# Altium PCB Micromouse_PCB.PcbDoc
Units mm, origin at the board's own origin, x right, y up, seen from the top; angles counter-clockwise.
Board outline 100 x 109.99 mm, 2 copper layers (Top Layer, Bottom Layer); 98 components, 75 nets, 345 pads, 0 vias.
Unrouted connection lines stored in the file: 242.
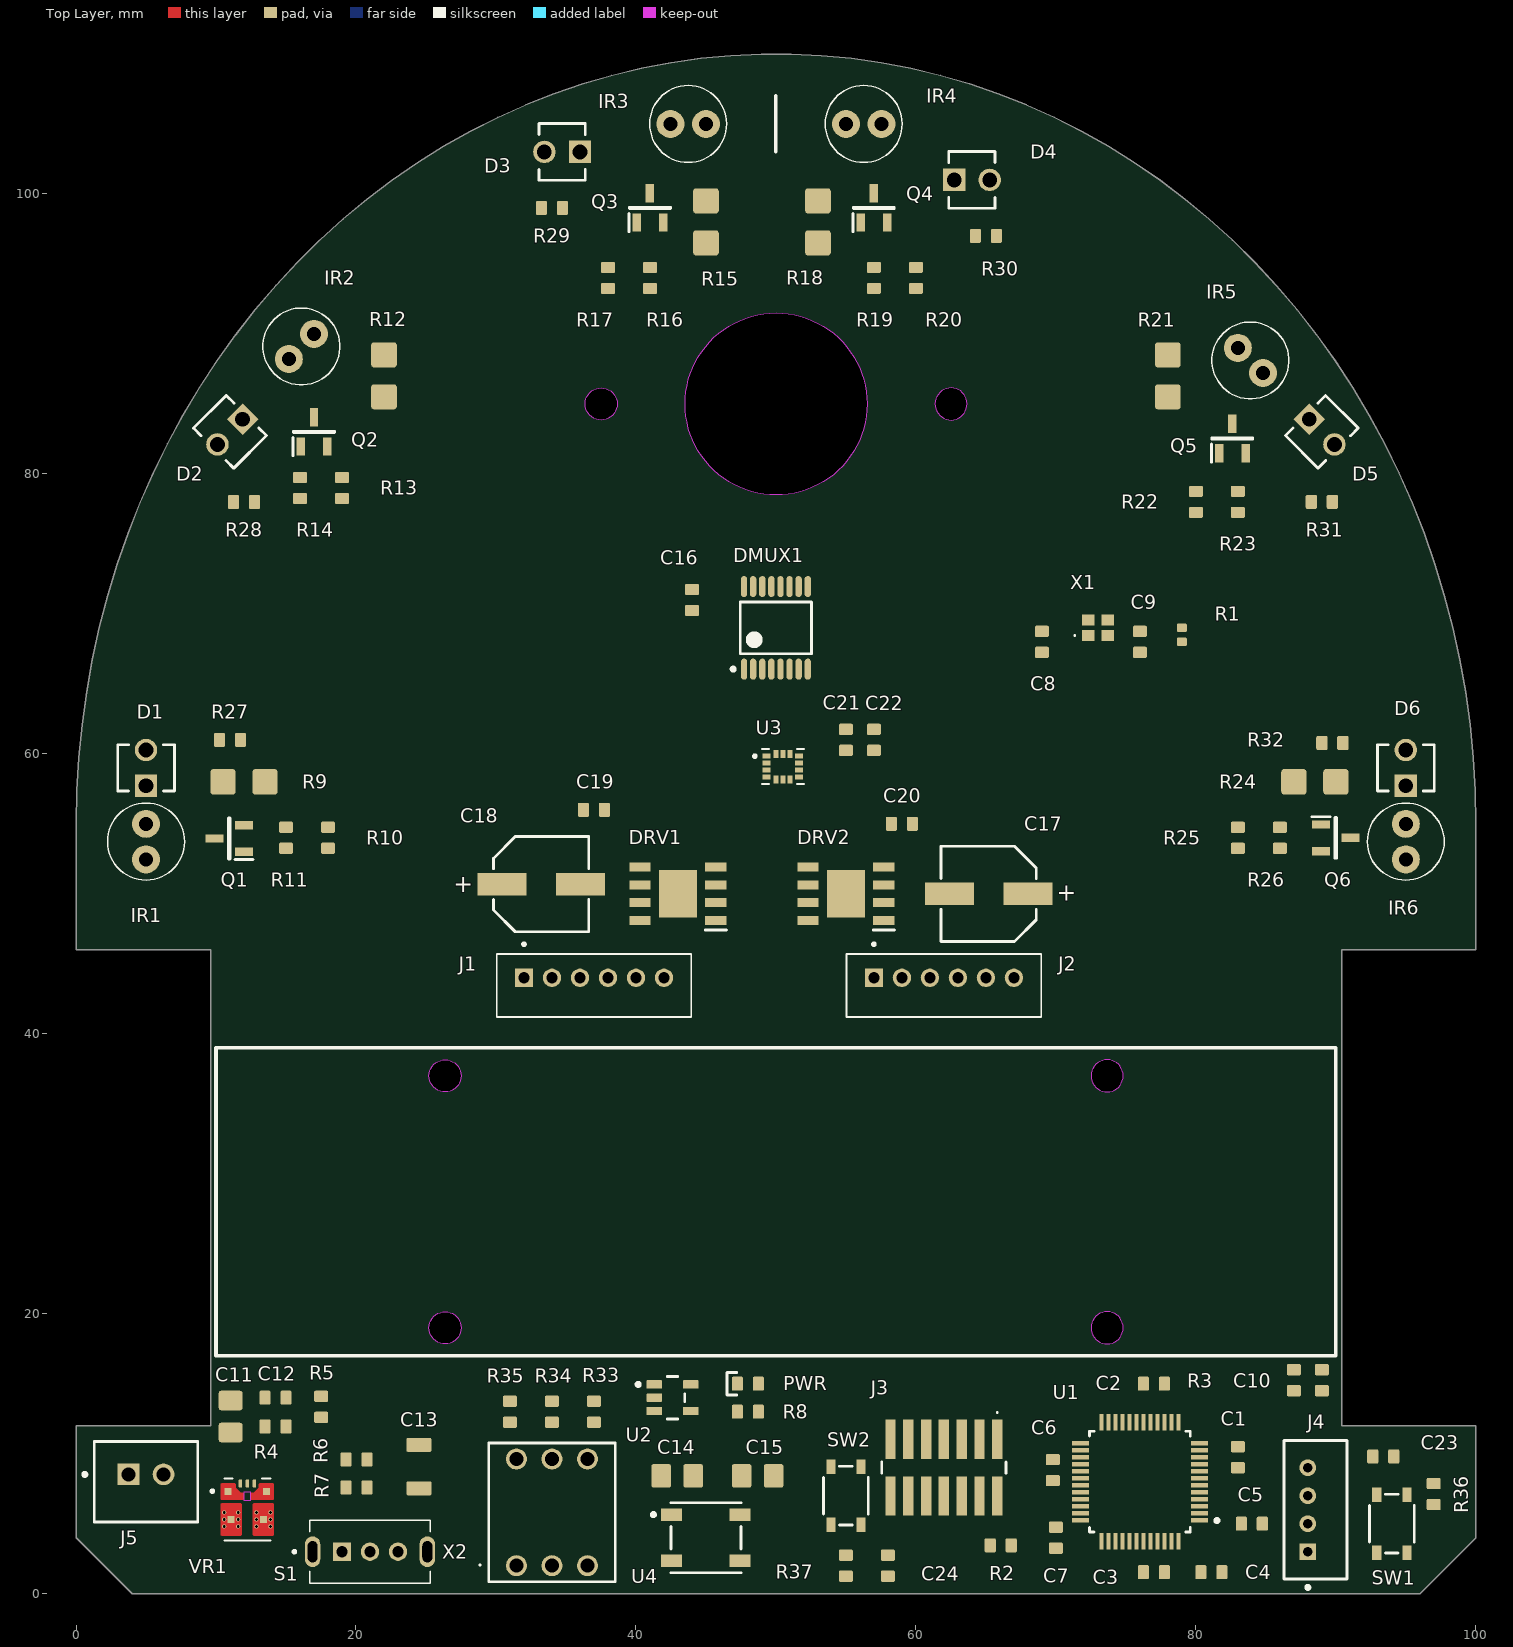
[diagram p0: Top Layer view]
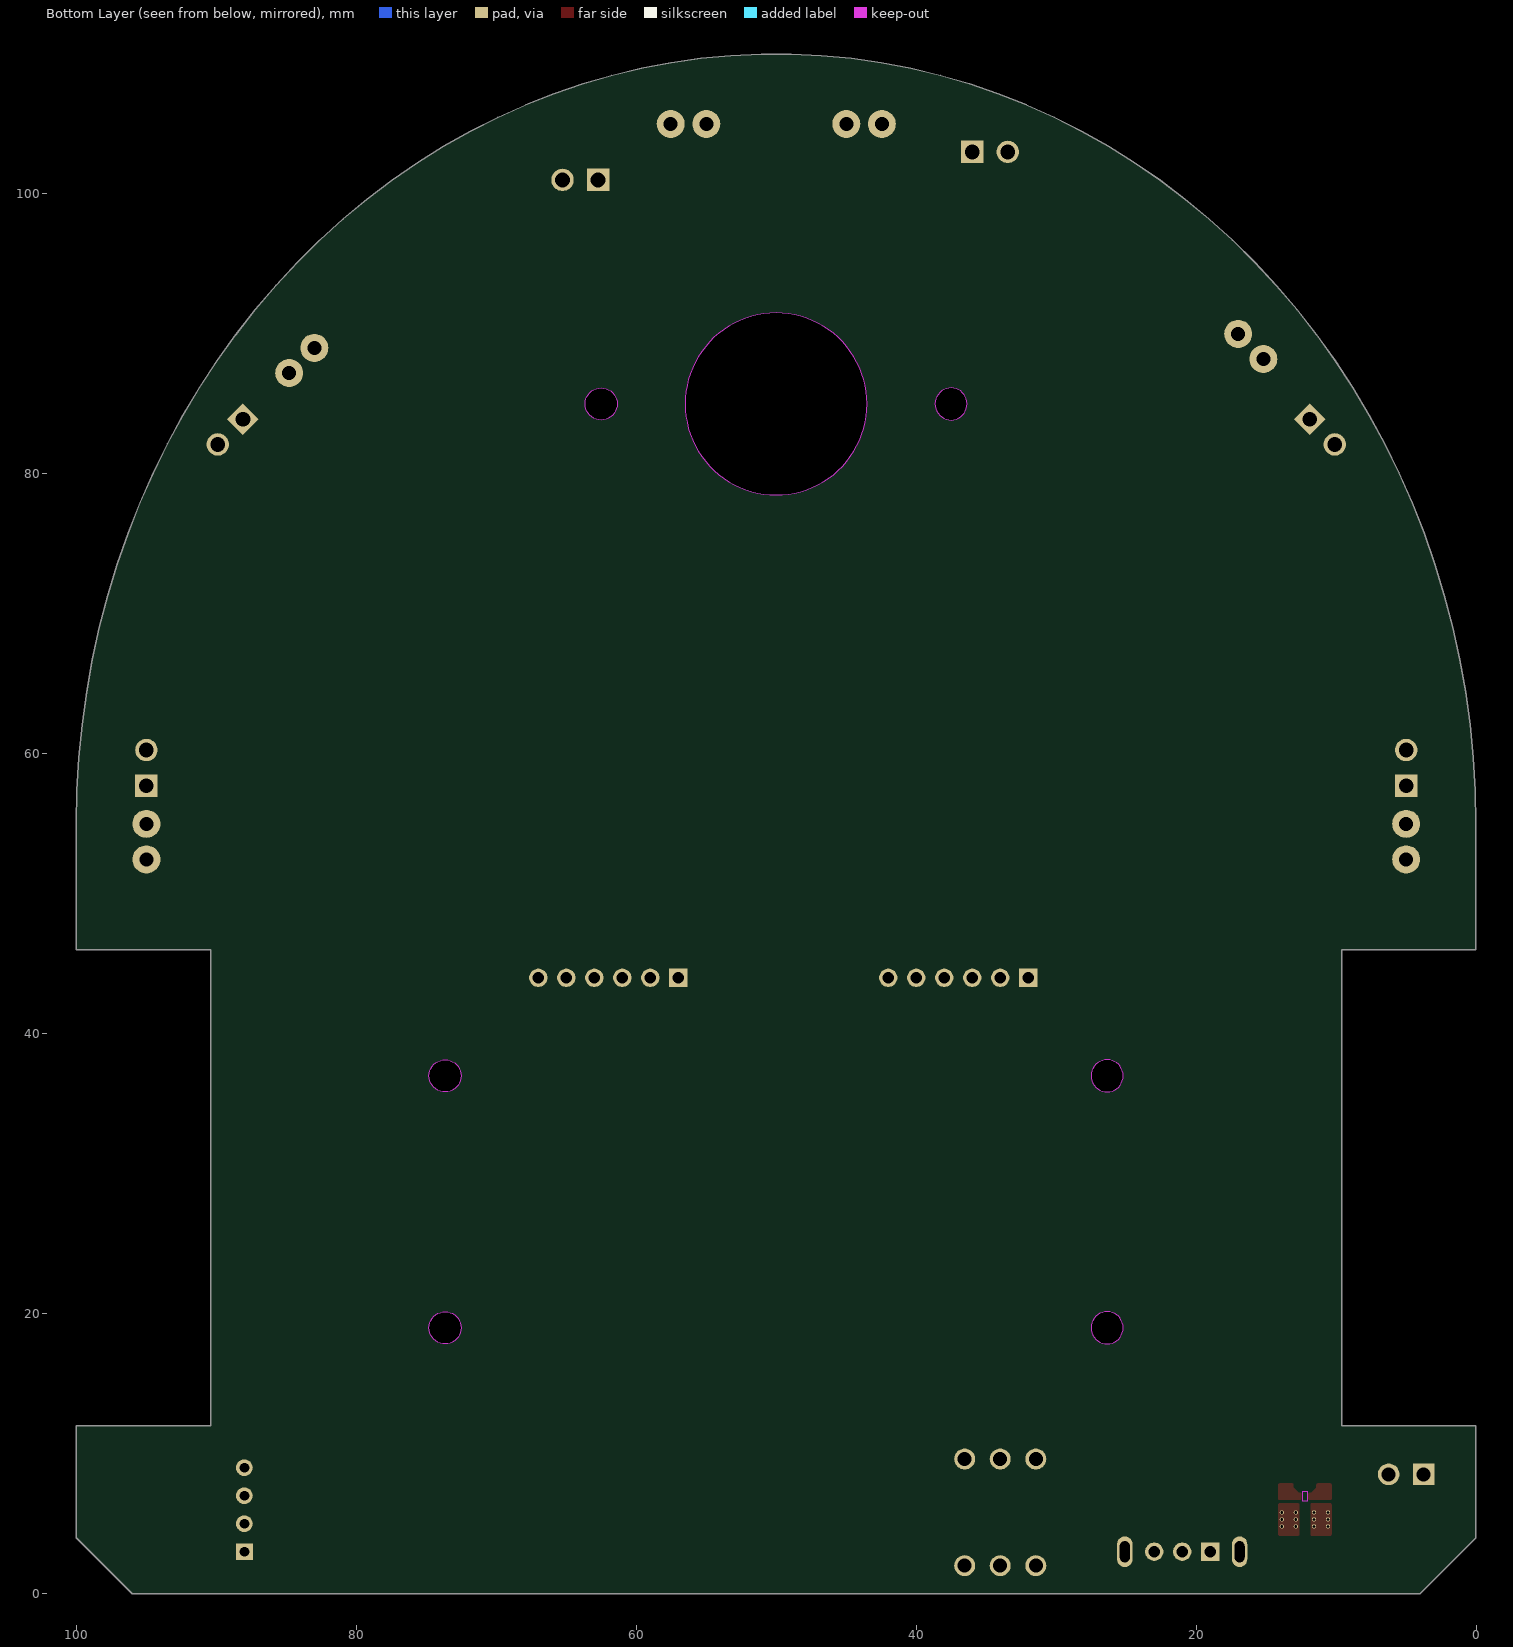
[diagram p1: Bottom Layer view, seen from below]

## Layer stack, top to bottom
Top Solder: solder mask 0.0102, Solder Resist, Dk 3.5
Top Layer: signal copper 0.0356
Dielectric 1: dielectric 0.32, FR-4, Dk 4.8
Bottom Layer: signal copper 0.0356
Bottom Solder: solder mask 0.0102, Solder Resist, Dk 3.5

## Board outline
4.013,-0.007 0.013,3.993 0.013,11.993 9.613,11.993 9.613,45.993 0.013,45.993 0.013,54.993 0.059,57.36 0.198,59.721 0.429,62.075 0.752,64.415 1.166,66.737 1.67,69.038 2.264,71.313 2.947,73.557 3.716,75.767 4.572,77.939 5.511,80.068 6.533,82.151 7.636,84.184 8.817,86.162 10.074,88.083 11.405,89.942 12.808,91.737 14.279,93.464 15.817,95.119 17.418,96.7 19.079,98.204 20.798,99.628 22.571,100.969 24.394,102.225 26.265,103.394 28.18,104.473 30.136,105.46 32.128,106.354 34.153,107.153 36.208,107.856 38.288,108.46 40.39,108.965 42.51,109.371 44.644,109.675 46.787,109.879 48.937,109.981 51.089,109.981 53.238,109.879 55.382,109.675 57.515,109.371 59.635,108.965 61.737,108.46 63.818,107.856 65.872,107.153 67.898,106.354 69.89,105.46 71.845,104.473 73.76,103.394 75.631,102.225 77.455,100.969 79.228,99.628 80.946,98.204 82.608,96.7 84.209,95.119 85.746,93.464 87.218,91.737 88.621,89.942 89.952,88.083 91.209,86.162 92.39,84.184 93.492,82.151 94.514,80.068 95.454,77.939 96.309,75.767 97.079,73.557 97.761,71.313 98.355,69.038 98.86,66.737 99.274,64.415 99.597,62.075 99.828,59.721 99.966,57.36 100.013,54.993 100.013,45.993 90.413,45.993 90.413,11.993 100.013,11.993 100.013,3.993 96.013,-0.007
cut-out: 62.513,83.843 ccw(c62.513,84.993) 63.663,84.993 ccw(c62.513,84.993) 62.513,86.143 ccw(c62.513,84.993) 61.363,84.993 ccw(c62.513,84.993)
cut-out: 50.013,78.493 cw(c50.013,84.993) 43.513,84.993 cw(c50.013,84.993) 50.013,91.493 cw(c50.013,84.993) 56.513,84.993 cw(c50.013,84.993)
cut-out: 37.513,83.843 cw(c37.513,84.993) 36.363,84.993 cw(c37.513,84.993) 37.513,86.143 cw(c37.513,84.993) 38.663,84.993 cw(c37.513,84.993)
cut-out: 72.513,36.993 ccw(c73.663,36.993) 73.663,35.843 ccw(c73.663,36.993) 74.813,36.993 ccw(c73.663,36.993) 73.663,38.143 ccw(c73.663,36.993)
cut-out: 72.513,18.993 ccw(c73.663,18.993) 73.663,17.843 ccw(c73.663,18.993) 74.813,18.993 ccw(c73.663,18.993) 73.663,20.143 ccw(c73.663,18.993)
cut-out: 26.363,35.843 cw(c26.363,36.993) 25.213,36.993 cw(c26.363,36.993) 26.363,38.143 cw(c26.363,36.993) 27.513,36.993 cw(c26.363,36.993)
cut-out: 26.363,17.843 cw(c26.363,18.993) 25.213,18.993 cw(c26.363,18.993) 26.363,20.143 cw(c26.363,18.993) 27.513,18.993 cw(c26.363,18.993)

## Design rules (kind name [scope] priority, off if disabled: settings)
Clearance [All] p1: gap=0.254 ignorepadtopadclearanceinfootprint=TRUE
PolygonConnect [All] p1: connectstyle=Relief reliefconductorwidth=0.254 reliefentries=4 polygonreliefangle="90 Angle" airgapwidth=0.254
RoutingVias [All] p1: holewidth=0.711 width=1.27 viastyle="Through Hole" minholewidth=0.711 minwidth=1.27 maxholewidth=0.711 maxwidth=1.27
SolderMaskExpansion [All] p1: expansion=0 istentingtop=FALSE
SupplyNets "Schematic Supply Nets_3" [InNet('+5v')] p1: voltage=0.000
SupplyNets "Schematic Supply Nets_2" [InNet('+3v3')] p2: voltage=0.000
SupplyNets "Schematic Supply Nets_1" [InNet('GND')] p3: voltage=0.000
SupplyNets "Schematic Supply Nets" [InNet('VBAT')] p4: voltage=0.000
Width [All] p1: maxlimit=0.254 minlimit=0.254 preferedwidth=0.254
30 further rules are at their usual default settings.

## Components (designator, comment, footprint, x,y, rotation, side; value= is the part's Value field where it differs from the comment)
C1 "4.7u" CAP_0603 83,9.75 r90 top
C2 "100n" CAP_0603 77,15 r180 top
C3 "100n" CAP_0603 77,1.538 r0 top
C4 "100n" CAP_0603 81.107,1.538 r180 top
C5 "100n" CAP_0603 84,5 r180 top
C6 "100n" CAP_0603 69.781,8.829 r270 top
C7 "100n" CAP_0603 70,4 r90 top
C8 "6.8p" CAP_0603 69,68 r270 top
C9 "6.8p" CAP_0603 76,68 r90 top
C10 "100n" CAP_0603 89,15.25 r90 top
C11 "10u" CAP_0805 11.045,12.657 r270 top
C12 "100n" CAP_0603 14.25,14 r180 top
C13 "47u" CAP_1206 24.502,9.079 r90 top
C14 "1u" CAP_0805 42.946,8.419 r180 top
C15 "1u" CAP_0805 48.693,8.419 r0 top
C16 "100n" CAP_0603 44,71 r90 top
C17 "47u" WCAP-ASLI_D6.3H5.5 65.2,50 r0 top
C18 "47u" WCAP-ASLI_D6.3H5.5 33.225,50.686 r180 top
C19 "100n" CAP_0603 37,56 r0 top
C20 "100n" CAP_0603 59,55 r180 top
C21 "100n" CAP_0603 55,61 r270 top
C22 "100n" CAP_0603 57,61 r270 top
C23 "100n" CAP_0603 93.393,9.804 r180 top
C24 "100n" CAP_0603 58,2 r90 top
D1 "TEFT4300" FP-6_544-5269_01-4-MFG 5,59 r90 top
D2 "TEFT4300" FP-6_544-5269_01-4-MFG 11,83 r225 top
D3 "TEFT4300" FP-6_544-5269_01-4-MFG 34.73,103 r180 top
D4 "TEFT4300" FP-6_544-5269_01-4-MFG 64,101 r0 top
D5 "TEFT4300" FP-6_544-5269_01-4-MFG 89,83 r315 top
D6 "TEFT4300" FP-6_544-5269_01-4-MFG 95,59 r90 top
DMUX1 "SN74AHC238PWR" TSOP65P640X120-16N 50,69 r90 top
DRV1 "DRV8251DDAR" SOIC127P600X170-9N 43,50 r180 top
DRV2 "DRV8251DDAR" SOIC127P600X170-9N 55,50 r180 top
IR1 "SFH_4545" SFH4545 5,52.46 r90 top
IR2 "SFH_4545" SFH4545 15.204,88.204 r45 top
IR3 "SFH_4545" SFH4545 42.46,105 r0 top
IR4 "SFH_4545" SFH4545 57.54,105 r180 top
IR5 "SFH_4545" SFH4545 84.796,87.204 r135 top
IR6 "SFH_4545" SFH4545 95,52.46 r90 top
J1 "JST-PH-Left-Motor" JST_B6B-PH-K-S(LF)(SN) 37,43.45 r180 top
J2 "JST-PH-Right-Motor" JST_B6B-PH-K-S(LF)(SN) 62,43.45 r180 top
J3 "STDC14 - SWD" FTSH10701LDVKTR 62,9 r180 top
J4 "B4B-PH-K(LF)(SN)" FP-B4B-PH-K_LF_SN-MFG 88.55,6 r270 top
J5 "B2B-XH-A(LF)(SN)" FP-B2B-XH-A_LF_SN-MFG 5,8 r0 top
PWR "RED" LED_0603_RED 48,15 r0 top (schematic designator D7)
Q1 "IRLML6344TRPBF" SOT95P237X112-3N 10.95,53.95 r180 top
Q2 "IRLML6344TRPBF" SOT95P237X112-3N 17,83 r90 top
Q3 "IRLML6344TRPBF" SOT95P237X112-3N 41,99 r90 top
Q4 "IRLML6344TRPBF" SOT95P237X112-3N 57,99 r90 top
Q5 "IRLML6344TRPBF" SOT95P237X112-3N 82.608,82.525 r90 top
Q6 "IRLML6344TRPBF" SOT95P237X112-3N 90,54 r0 top
R1 "0R" RES_0402 79,68.5 r270 top
R2 "10k" RES_0603 66.058,3.45 r0 top
R3 "10k" RES_0603 87,15.25 r270 top
R4 "10k" RES_0603 14.25,11.952 r180 top
R5 "2.2k" RES_0603 17.513,13.35 r270 top
R6 "220k" RES_0603 20.041,9.585 r0 top
R7 "30k" RES_0603 20.041,7.585 r180 top
R8 "1k" RES_0603 48,13 r180 top
R9 "18" RES_1206 12,58 r0 top
R10 "100" RES_0603 18,54 r270 top
R11 "100k" RES_0603 15,54 r270 top
R12 "18" RES_1206 22,87 r270 top
R13 "100" RES_0603 19,79 r90 top
R14 "100k" RES_0603 16,79 r90 top
R15 "18" RES_1206 45,98 r270 top
R16 "100" RES_0603 41,94 r90 top
R17 "100k" RES_0603 38,94 r90 top
R18 "18" RES_1206 53,98 r270 top
R19 "100" RES_0603 57,94 r90 top
R20 "100k" RES_0603 60,94 r90 top
R21 "18" RES_1206 78,87 r270 top
R22 "100" RES_0603 80,78 r90 top
R23 "100k" RES_0603 83,78 r90 top
R24 "18" RES_1206 88.5,58 r180 top
R25 "100" RES_0603 83,54 r90 top
R26 "100k" RES_0603 86,54 r90 top
R27 "10k" RES_0603 11,61 r0 top
R28 "10k" RES_0603 12,78 r180 top
R29 "10k" RES_0603 34,99 r180 top
R30 "10k" RES_0603 65,97 r0 top
R31 "10k" RES_0603 89,78 r0 top
R32 "10k" RES_0603 89.75,60.77 r180 top
R33 "10k" RES_0603 37,13 r270 top
R34 "10k" RES_0603 34,13 r270 top
R35 "10k" RES_0603 31,13 r270 top
R36 "10k" RES_0603 96.991,7.119 r90 top
R37 "10k" RES_0603 55,2 r90 top
S1 "Switch" SW_SLW-864574-5A-RA-N-D 21,3 r0 top
SW1 "434123025826" 434123025826 94,5 r90 top
SW2 "434123025826" 434123025826 55,7 r90 top
U1 "STM32G474CET6" FP-STM32G474CET6-MFG 76,8 r180 top
U2 "TPS7A2033PDBVR" FP-DBV0005A-MFG 42.61,14 r0 top
U3 "LSM6DSO32TR" XDCR_LSM6DSO32TR 50.5,59.087 r0 top
U4 "WS2812B" ADAI-WS2812B_V 45,4 r0 top
VR1 "TPSM863252RDXR" VREG_TPSM863252RDXR 12.234,5.974 r0 top
X1 "24 MHz HSE" CX2016FB24000B0FZZH1 73,69 r0 top
X2 "DS01C-254-S-03BE" DS01C254S03BE 31.46,2 r0 top

## Footprints (in the part's own frame and the unit in brackets; to place one, negate y for a bottom-side part, rotate by r counter-clockwise, add the part's x,y. Pads: shape width x height; smd on the part's side, far side on the other; paste and mask are expansions set on the pad)
434123025826 [mm] "Tact Switch, SMD, body 4.2x3.2mm"
  rect 1.05x0.65 smd: A1(-2.075,1.075) A2(2.075,1.075) B1(-2.075,-1.075) B2(2.075,-1.075)
  silkscreen extent -2.1,-1.6 2.1,1.6, body extent -2.3,-1.6 2.3,1.6, height 2.5
ADAI-WS2812B_V [mm] "SMD, 4-Leads, Body 5x5mm, Pitch 3.3mm"
  rect 1.5x0.9 smd: 1(-2.45,1.65) 2(-2.45,-1.65) 3(2.45,-1.65) 4(2.45,1.65)
  silkscreen extent -3.87,-2.5 2.5,2.5, body extent -2.7,-2.5 2.7,2.5, height 1.69
CAP_0603 [mm]
  rrect25% 0.8x1 smd: 1(-0.75,0) 2(0.75,0)
  body extent -0.8,-0.4 0.8,0.4, height 0.51
CAP_0805 [mm]
  rrect25% 1.4x1.7 smd: 1(-1.143,0) 2(1.143,0)
  body extent -1.15,-0.76 1.15,0.79, height 1.01
CAP_1206 [mm]
  rrect25% 1x1.8 smd: 1(-1.55,0) 2(1.55,0)
  body extent -1.6,-0.8 1.6,0.8, height 0.94
CX2016FB24000B0FZZH1 [mm]
  rect 0.9x0.8 smd: 1(-0.7,-0.55) 2(0.7,-0.55) 3(0.7,0.55) 4(-0.7,0.55)
  silkscreen extent -1.7,-0.6 -1.6,-0.5, body extent -1.07,-0.87 1.07,0.87, height 0.65
DS01C254S03BE [mm]
  round 1.5 hole 1: 1(0,0) 2(0,7.62) 3(2.54,0) 4(2.54,7.62) 5(5.08,0) 6(5.08,7.62)
  silkscreen extent -2.65,-1.14 7.06,8.76, body extent -1.96,-1.14 7.08,8.76, height 6.55
FP-6_544-5269_01-4-MFG [mm]
  rect 1.6x1.6 hole 1.05 paste-2539.97 mask+0: 1(-1.27,0)
  round 1.6 hole 1.05 paste-2539.97 mask+0: 2(1.27,0)
  silkscreen extent -1.65,-2.02 1.65,2.02, body extent -2.17,-2.12 2.17,2.12, height 0.25
FP-B2B-XH-A_LF_SN-MFG [mm]
  rect 1.55x1.55 hole 1 paste-2539.97 mask+0: 1(-1.25,0.525)
  round 1.55 hole 1 paste-2539.97 mask+0: 2(1.25,0.525)
  silkscreen extent -4.5,-2.88 3.7,2.88, body extent -3.8,-2.98 3.8,2.98, height 0.25
FP-B4B-PH-K_LF_SN-MFG [mm]
  rect 1.2x1.2 hole 0.7 paste-2539.97 mask+0: 1(3,-0.55)
  round 1.2 hole 0.7 paste-2539.97 mask+0: 2(1,-0.55) 3(-1,-0.55) 4(-3,-0.55)
  silkscreen extent -4.95,-2.25 5.67,2.25, body extent -5.05,-2.35 5.05,2.35, height 0.25
FP-DBV0005A-MFG [mm]
  rrect17% 1.1x0.6 smd paste+0 mask+0: 1(-1.3,0.95) 2(-1.3,0) 3(-1.3,-0.95) 4(1.3,-0.95) 5(1.3,0.95)
  silkscreen extent -2.57,-1.53 0.87,1.53, body extent -1.95,-1.78 1.95,1.78, height 0.25
FP-STM32G474CET6-MFG [mm]
  rect 1.2x0.3 smd paste+0 mask+0: 1(-4.25,2.75) 2(-4.25,2.25) 3(-4.25,1.75) 4(-4.25,1.25) 5(-4.25,0.75) 6(-4.25,0.25) 7(-4.25,-0.25) 8(-4.25,-0.75) 9(-4.25,-1.25) 10(-4.25,-1.75) 11(-4.25,-2.25) 12(-4.25,-2.75) 25(4.25,-2.75) 26(4.25,-2.25) 27(4.25,-1.75) 28(4.25,-1.25) 29(4.25,-0.75) 30(4.25,-0.25) 31(4.25,0.25) 32(4.25,0.75) 33(4.25,1.25) 34(4.25,1.75) 35(4.25,2.25) 36(4.25,2.75)
  rect 0.3x1.2 smd paste+0 mask+0: 13(-2.75,-4.25) 14(-2.25,-4.25) 15(-1.75,-4.25) 16(-1.25,-4.25) 17(-0.75,-4.25) 18(-0.25,-4.25) 19(0.25,-4.25) 20(0.75,-4.25) 21(1.25,-4.25) 22(1.75,-4.25) 23(2.25,-4.25) 24(2.75,-4.25) 37(2.75,4.25) 38(2.25,4.25) 39(1.75,4.25) 40(1.25,4.25) 41(0.75,4.25) 42(0.25,4.25) 43(-0.25,4.25) 44(-0.75,4.25) 45(-1.25,4.25) 46(-1.75,4.25) 47(-2.25,4.25) 48(-2.75,4.25)
  silkscreen extent -5.63,-3.6 3.6,3.6, body extent -4.95,-4.95 4.95,4.95, height 0.25
FTSH10701LDVKTR [mm]
  rect 0.74x2.79 smd: 1(-3.81,-2.035) 2(-3.81,2.035) 3(-2.54,-2.035) 4(-2.54,2.035) 5(-1.27,-2.035) 6(-1.27,2.035) 7(0,-2.035) 8(0,2.035) 9(1.27,-2.035) 10(1.27,2.035) 11(2.54,-2.035) 12(2.54,2.035) 13(3.81,-2.035) 14(3.81,2.035)
  silkscreen extent -4.44,-4 4.44,0.4, body extent -4.44,-2.92 4.44,2.92, height 6.12
JST_B6B-PH-K-S(LF)(SN) [mm]
  rect 1.308x1.308 / inner round 1.308 / far side rect 1.308x1.308 hole 0.8: 1(5,-0.55)
  round 1.308 hole 0.8: 2(3,-0.55) 3(1,-0.55) 4(-1,-0.55) 5(-3,-0.55) 6(-5,-0.55)
  silkscreen extent -6.95,-3.05 6.95,2.25, body extent -6.95,-2.21 6.95,2.29, height 6
LED_0603_RED [mm]
  rrect25% 0.8x1 smd: A(0.75,0) K(-0.75,0)
  silkscreen extent -1.5,-0.8 -0.8,0.8, body extent -0.8,-0.4 0.8,0.4, height 0.6
RES_0402 [mm]
  rrect25% 0.6x0.7 smd: 1(-0.5,0) 2(0.5,0)
  body extent -0.5,-0.25 0.5,0.25, height 0.3
RES_0603 [mm]
  rrect25% 0.8x1 smd: 1(-0.75,0) 2(0.75,0)
  body extent -0.8,-0.43 0.8,0.43, height 0.52
RES_1206 [mm]
  rrect25% 1.8x1.84 smd: 1(-1.5,0) 2(1.5,0)
  body extent -1.6,-0.83 1.6,0.83, height 0.57
SFH4545 [mm]
  round 2 hole 1: 1(0,0) 2(2.54,0)
  silkscreen extent -1.48,-2.75 4.02,2.75, body extent -1.23,-2.79 4.02,2.71, height 7.7
SOIC127P600X170-9N [mm]
  rect 1.525x0.65 smd: 1(-2.712,1.905) 2(-2.712,0.635) 3(-2.712,-0.635) 4(-2.712,-1.905) 5(2.712,-1.905) 6(2.712,-0.635) 7(2.712,0.635) 8(2.712,1.905)
  rect 2.71x3.4 smd: 9(0,0)
  silkscreen extent -3.47,2.58 -1.95,2.58, body extent -3,-2.45 3,2.45, height 1.7
SOT95P237X112-3N [mm]
  rect 1.3x0.6 smd: 1(-1.05,0.95) 2(-1.05,-0.95) 3(1.05,0)
  silkscreen extent -1.7,-1.46 0.05,1.5, body extent -1.23,-1.46 1.14,1.46, height 1.12
SW_SLW-864574-5A-RA-N-D [mm]
  rect 1.308x1.308 / inner round 1.308 / far side rect 1.308x1.308 hole 0.8: 1(-2,0)
  round 1.308 hole 0.8: 2(0,0) 3(2,0)
  oval 1.1x2.2 hole 0.7 slot 1.5 at 90 deg: SH1(-4.1,0) SH2(4.1,0)
  silkscreen extent -5.5,-2.25 4.3,2.25, body extent -4.28,-7.29 4.32,2.21, height 4.71
TSOP65P640X120-16N [mm] "TSOP, 16-Leads, Body 5.00x4.40mm, Pitch 0.65mm, IPC Medium Density"
  oval 1.5x0.45 smd: 1(-2.95,2.275) 2(-2.95,1.625) 3(-2.95,0.975) 4(-2.95,0.325) 5(-2.95,-0.325) 6(-2.95,-0.975) 7(-2.95,-1.625) 8(-2.95,-2.275) 9(2.95,-2.275) 10(2.95,-1.625) 11(2.95,-0.975) 12(2.95,-0.325) 13(2.95,0.325) 14(2.95,0.975) 15(2.95,1.625) 16(2.95,2.275)
  silkscreen extent -3.07,-2.55 1.85,3.17, body extent -3.2,-2.55 3.2,2.55, height 1.2
VREG_TPSM863252RDXR [mm]
  rect 0.5x0.5 smd paste-1 mask+0: 1(-1.362,1.338) 2(-1.15,-0.675) 3(1.15,-0.675) 4(1.362,1.338)
  rrect50% 0.22x0.6 smd mask+0: 5(0.5,1.9) 6(0,1.9) 7(-0.5,1.9)
  round 0.3 hole 0.2 mask+0: 8(-1.65,-0.165) 9(-1.65,-0.665) 10(-1.65,-1.165) 11(-0.65,-0.165) 12(-0.65,-0.665) 13(-0.65,-1.165) 14(0.65,-0.165) 15(0.65,-0.665) 16(0.65,-1.165) 17(1.65,-0.165) 18(1.65,-0.665) 19(1.65,-1.165)
  Top Layer region: 205 vertices and 0 holes, not listed, extent 0.255,0.725 1.9,1.9
  Top Layer region: 1.81,0.474 1.816,0.474 1.821,0.473 1.826,0.472 1.831,0.47 1.836,0.468 1.841,0.466 1.845,0.464 1.85,0.462 1.854,0.459 1.859,0.456 1.863,0.453 1.867,0.449 1.871,0.446 1.874,0.442 1.878,0.438 1.881,0.434 1.884,0.429 1.887,0.425 1.889,0.42 1.891,0.416 1.893,0.411 1.895,0.406 1.897,0.401 1.898,0.396 1.899,0.391 1.899,0.385 1.9,0.38 1.9,0.375 1.9,-1.725 1.9,-1.73 1.899,-1.735 1.899,-1.741 1.898,-1.746 1.897,-1.751 1.895,-1.756 1.893,-1.761 1.891,-1.766 1.889,-1.77 1.887,-1.775 1.884,-1.779 1.881,-1.784 1.878,-1.788 1.874,-1.792 1.871,-1.796 1.867,-1.799 1.863,-1.803 1.859,-1.806 1.854,-1.809 1.85,-1.812 1.845,-1.814 1.841,-1.816 1.836,-1.818 1.831,-1.82 1.826,-1.822 1.821,-1.823 1.816,-1.824 1.81,-1.824 1.805,-1.825 0.495,-1.825 0.49,-1.824 0.484,-1.824 0.479,-1.823 0.474,-1.822 0.469,-1.82 0.464,-1.818 0.459,-1.816 0.455,-1.814 0.45,-1.812 0.446,-1.809 0.441,-1.806 0.437,-1.803 0.433,-1.799 0.429,-1.796 0.426,-1.792 0.422,-1.788 0.419,-1.784 0.416,-1.779 0.413,-1.775 0.411,-1.77 0.409,-1.766 0.407,-1.761 0.405,-1.756 0.403,-1.751 0.402,-1.746 0.401,-1.741 0.401,-1.735 0.4,-1.73 0.4,-1.725 0.4,0.375 0.4,0.38 0.401,0.385 0.401,0.391 0.402,0.396 0.403,0.401 0.405,0.406 0.407,0.411 0.409,0.416 0.411,0.42 0.413,0.425 0.416,0.429 0.419,0.434 0.422,0.438 0.426,0.442 0.429,0.446 0.433,0.449 0.437,0.453 0.441,0.456 0.446,0.459 0.45,0.462 0.455,0.464 0.459,0.466 0.464,0.468 0.469,0.47 0.474,0.472 0.479,0.473 0.484,0.474 0.49,0.474 0.495,0.475 1.805,0.475
  Top Layer region: 205 vertices and 0 holes, not listed, extent -1.9,0.725 -0.255,1.9
  Top Layer region: -0.49,0.474 -0.484,0.474 -0.479,0.473 -0.474,0.472 -0.469,0.47 -0.464,0.468 -0.459,0.466 -0.455,0.464 -0.45,0.462 -0.446,0.459 -0.441,0.456 -0.437,0.453 -0.433,0.449 -0.429,0.446 -0.426,0.442 -0.422,0.438 -0.419,0.434 -0.416,0.429 -0.413,0.425 -0.411,0.42 -0.409,0.416 -0.407,0.411 -0.405,0.406 -0.403,0.401 -0.402,0.396 -0.401,0.391 -0.401,0.385 -0.4,0.38 -0.4,0.375 -0.4,-1.725 -0.4,-1.73 -0.401,-1.735 -0.401,-1.741 -0.402,-1.746 -0.403,-1.751 -0.405,-1.756 -0.407,-1.761 -0.409,-1.766 -0.411,-1.77 -0.413,-1.775 -0.416,-1.779 -0.419,-1.784 -0.422,-1.788 -0.426,-1.792 -0.429,-1.796 -0.433,-1.799 -0.437,-1.803 -0.441,-1.806 -0.446,-1.809 -0.45,-1.812 -0.455,-1.814 -0.459,-1.816 -0.464,-1.818 -0.469,-1.82 -0.474,-1.822 -0.479,-1.823 -0.484,-1.824 -0.49,-1.824 -0.495,-1.825 -1.805,-1.825 -1.81,-1.824 -1.816,-1.824 -1.821,-1.823 -1.826,-1.822 -1.831,-1.82 -1.836,-1.818 -1.841,-1.816 -1.845,-1.814 -1.85,-1.812 -1.854,-1.809 -1.859,-1.806 -1.863,-1.803 -1.867,-1.799 -1.871,-1.796 -1.874,-1.792 -1.878,-1.788 -1.881,-1.784 -1.884,-1.779 -1.887,-1.775 -1.889,-1.77 -1.891,-1.766 -1.893,-1.761 -1.895,-1.756 -1.897,-1.751 -1.898,-1.746 -1.899,-1.741 -1.899,-1.735 -1.9,-1.73 -1.9,-1.725 -1.9,0.375 -1.9,0.38 -1.899,0.385 -1.899,0.391 -1.898,0.396 -1.897,0.401 -1.895,0.406 -1.893,0.411 -1.891,0.416 -1.889,0.42 -1.887,0.425 -1.884,0.429 -1.881,0.434 -1.878,0.438 -1.874,0.442 -1.871,0.446 -1.867,0.449 -1.863,0.453 -1.859,0.456 -1.854,0.459 -1.85,0.462 -1.845,0.464 -1.841,0.466 -1.836,0.468 -1.831,0.47 -1.826,0.472 -1.821,0.473 -1.816,0.474 -1.81,0.474 -1.805,0.475 -0.495,0.475
  Keep-Out Layer region: 0.2,0.675 -0.2,0.675 -0.2,1.295 0.2,1.295
  silkscreen extent -2.6,-2.17 1.65,2.25, body extent -1.65,-2 1.65,2, height 2.1
WCAP-ASLI_D6.3H5.5 [mm] "Aluminium Electrolytic V-Chip SMT Capacitors, 6.3x5.5mm"
  rect 3.5x1.6 smd: 1(2.8,0) 2(-2.8,0)
  silkscreen extent -3.4,-3.4 3.4,3.4, body extent -3.65,-3.3 3.65,3.3, height 5.5
XDCR_LSM6DSO32TR [mm]
  rect 0.575x0.35 smd mask+0.05: 1(-1.162,0.75) 2(-1.162,0.25) 3(-1.162,-0.25) 4(-1.162,-0.75) 8(1.162,-0.75) 9(1.162,-0.25) 10(1.162,0.25) 11(1.162,0.75)
  rect 0.35x0.575 smd mask+0.05: 5(-0.5,-0.913) 6(0,-0.913) 7(0.5,-0.913) 12(0.5,0.913) 13(0,0.913) 14(-0.5,0.913)
  silkscreen extent -2.1,-1.25 1.5,1.25, body extent -1.5,-1.25 1.5,1.25, height 0.86

## Part data
C1 C2 C3 C4 C5 C6 C7 C8 C9 C10 C12 C16 C19 C20 C21 C22 C23 C24: library part CAP_0603, "Capacitor SMD 0603"
C11 C14 C15: library part CAP_0805, "Capacitor SMD 0805"
C13: library part CAP_1206, "Capacitor SMD 1206"
C17 C18: library part CMP-03913-53914590-2, "WCAP-ASLI Aluminum Electrolytic Capacitors", Capacitance=47µF, Case/Package=Radial, ESR (Equivalent Series Resistance)=397.678mΩ, Insulation Resistance=2.12766MΩ, Leakage Current=11.75µA, Max Operating Temperature=105°C, Min Operating Temperature=-55°C, Ripple Current=220mA, Tolerance=20%, Voltage Rating=25V, Diameter=6.3mm, Height=5.5mm, Height - Seated (Max)=5.5118mm, Impedance=560mΩ, Length=5.5mm, Life (Hours)=2000hours, Mount="Surface Mount", Polarity=Polar, REACH SVHC=Unknown, Ripple Current (AC)=220mA, RoHS=Compliant, Voltage Rating (DC)=25V, Width=6.6mm
D1 D2 D3 D4 D5 D6: library part CMP-00030-39729854-1, "TEFT4300 PHOTOTRANSISTOR 3.0MM WIDE VIEW / Phototransistor IR Chip Silicon 925nm 2-Pin T-1", Case/Package=T, Collector Emitter Breakdown Voltage=70V, Collector Emitter Saturation Voltage=300mV, Dark Current=200nA, Max Collector Current=50mA, Max Operating Temperature=100°C, Max Power Dissipation=100mW, Min Operating Temperature=-40°C, Collector Emitter Voltage (VCEO)=70V, Fall Time=2.3µs, Height=4.5mm, Lead Free="Lead Free", Length=3.2mm, Lens Style=Domed, Mount="Through Hole", NexarPartId=39729854, Number of Channels=1, Number of Elements=1, Number of Pins=2, Orientation="Top View", Polarity=NPN, Power Consumption=100mW, Power Dissipation=100mW, Radiation Hardening=No, REACH SVHC=Unknown, Rise Time=2µs, RoHS=Compliant, Schedule B="8541407080, 8541407080", Viewing Angle=30°, Wavelength=925nm, Width=3.9mm
DMUX1: library part CMP-015-00008-1, "3-line to 8-line inverting and noninverting decoder and demultiplexer with high-speed CMOS logic 16-TSSOP -40 to 125", Case/Package=TSSOP, Pins=16
DRV1 DRV2: library part CMP-051-000000-5, "Motor Drives", Manufacturer_Name="Texas Instruments", Mouser Part Number=595-DRV8251DDAR, Datasheet Link=https://www.arrow.com/en/products/drv8251ddar/texas-instruments?region=nac, Design Item ID=DRV8251DDAR, Geometry.Height=1.7mm, Manufacturer_Part_Number=DRV8251DDAR, Mouser Price/Stock=https://www.mouser.co.uk/ProductDetail/Texas-Instruments/DRV8251DDAR?qs=doiCPypUmgHTzZyfapGahQ%3D%3D, Source=DRV8251DDAR.SchLib
IR1 IR2 IR3 IR4 IR5 IR6: library part CMP-004-00035-3, "SFH 4545 Osram Opto, 950nm IR LED, 5 mm Through Hole package", Manufacturer_Name="ams OSRAM", Manufacturer_Part_Number="SFH 4545", Mouser Part Number=720-SFH4545, Datasheet Link=https://datasheet.datasheetarchive.com/originals/distributors/DKDS41/DSANUWW0036915.pdf, Design Item ID=SFH_4545, Geometry.Height=8.3mm, Mouser Price/Stock=https://www.mouser.co.uk/ProductDetail/ams-OSRAM/SFH-4545?qs=VcOkZLzzaubOJpq6Xyji1A%3D%3D, Source=SFH_4545.SchLib
J1 J2: library part CMP-067-000000-3, "Socket; wire-board; male; PH; 2mm; PIN: 6; THT; 100V; 2A; -25÷85°C", Package=None, Availability=Unavailable, Component Type=Standard, Design Item ID=B6B-PH-K-S(LF)(SN), MF="{'manufacturer': u'JST Sales America Inc.'}", MP=B6B-PH-K-S(LF)(SN), Pin Count=6, Price=None, Source=B6B-PH-K-S(LF)(SN).SchLib
J3: library part CMP-002-00074-2, "Conn Unshrouded Header HDR 14 POS 1.27mm Solder ST Top Entry SMD TIGER CLAW T/R", Manufacturer_Name=SAMTEC, Manufacturer_Part_Number=FTSH-107-01-L-DV-K-TR, Mouser Part Number=200-FTSH10701LDVKTR, Datasheet Link=https://suddendocs.samtec.com/prints/ftsh-1xx-xx-xxx-dv-xxx-xxx-x-xx-mkt.pdf?_gl=1*mdiyn1*_ga*MTcyMTUxMTIwMy4xNzEyMDQxMTc2*_ga_3KFNZC07WW*MTcxMjEzMDIxOS4yLjEuMTcxMjEzMDI1NC4yNS4wLjA., Design Item ID=FTSH-107-01-L-DV-K-TR, Geometry.Height=6.25mm, Mouser Price/Stock=https://www.mouser.co.uk/ProductDetail/Samtec/FTSH-107-01-L-DV-K-TR?qs=%252BZP6%2F%252BtExtDlh0wyxE013Q%3D%3D, Source=FTSH-107-01-L-DV-K-TR.SchLib
J4: library part CMP-002-00075-2, "Conn Shrouded Header (4 Sides) HDR 4 POS 2mm Solder ST Thru-Hole Box", Max Operating Temperature=85°C, Min Operating Temperature=-25°C, Voltage Rating=100V, Connector Type="Male Pin", Mounting Technology="Through Hole", Pins=4
J5: library part CMP-002-00076-1, "CONNECTOR HEADER, XH SERIES, 2 POSITION, 2.50MM, Press-Fit Solder, Detent Lock, Natural", Max Current Rating=3A, Max Operating Temperature=85°C, Min Operating Temperature=-25°C, Voltage Rating=250V, Connector Type="Male Pin", Mounting Technology="Through Hole", Pins=2
PWR: library part LED_0603_RED, "LED 0603 RED SMD"
Q1 Q2 Q3 Q4 Q5 Q6: library part CMP-072-000000-2, "IRLML6344TRPBF N-channel MOSFET Transistor, 5 A, 30 V, 3-Pin SOT-23", Manufacturer_Name=Infineon, Mouser Part Number=942-IRLML6344TRPBF, Datasheet Link=https://www.infineon.com/dgdl/irlml6344pbf.pdf?fileId=5546d462533600a4015356689c44262c, Design Item ID=IRLML6344TRPBF, Geometry.Height=1.12mm, Manufacturer_Part_Number=IRLML6344TRPBF, Mouser Price/Stock=https://www.mouser.co.uk/ProductDetail/Infineon-Technologies/IRLML6344TRPBF?qs=9%252BKlkBgLFf2w4qS48UOXVw%3D%3D, Source=IRLML6344TRPBF.SchLib
R1: library part RES_0402, "Resistor SMD 0402"
R2 R3 R4 R5 R6 R7 R8 R10 R11 R13 R14 R16 R17 R19 R20 R22 R23 R25 R26 R27 R28 R29 R30 R31 R32 R33 R34 R35 R36 R37: library part RES_0603, "Resistor SMD 0603"
R9 R12 R15 R18 R21 R24: library part RES_1206, "Resistor SMD 1206"
S1: library part CMP-069-000000-2, "8.6 x 4.5 x 6.2 mm, 5 mm Raised Slide Actuator, Right Angle, Through Hole, Slide Switch", Package=None, Availability=Unavailable, Component Type=Standard, Design Item ID=SLW-864574-5A-RA-N-D, MF="{'manufacturer': u'Same Sky (Formerly CUI Devices)'}", MP=SLW-864574-5A-RA-N-D, Pin Count=3, Price=None, Source=SLW-864574-5A-RA-N-D.SchLib
SW1 SW2: library part CMP-011-00013-1, "Tactile Switch, 0.05A, 16Vdc, 260Gf, Smd Rohs Compliant: Yes", Current Rating=50mA, Max Operating Temperature=85°C, Min Operating Temperature=-40°C, Voltage Rating=16V, Mounting Technology="Surface Mount", RoHS Compliant=Yes, Throw Configuration=SPST
U1: library part CMP-12105-000053-1, "MAINSTREAM ARM CORTEX-M4 CORE WI", Ambient Temperature Range High=+85°C, Ambient Temperature Range Low=-40°C, Frequency=170MHz, Manufacturer=STMicroelectronics, Max Junction Temp=+105°C, Max Supply Voltage=3.6V, Min Supply Voltage=1.62V, Package=LQFP48, Temperature="-40°C to +85°C", Automotive=No, Category=IC, ComponentLink2Description=Datasheet, ComponentLink2URL=https://www.st.com/resource/en/datasheet/stm32g474ce.pdf, Core Architecture="ARM Cortex-M4", Data Bus Width=32bits, Device Class L1="Integrated Circuits (ICs)", Device Class L2="Embedded Processors and Controllers", Device Class L3=Microcontrollers, Digikey Description="MAINSTREAM ARM CORTEX-M4 CORE WI", Height=1.6mm, Interface=I2C,SPI,UART,USART,CAN,USB,LIN,IrDA,I2S,SMBus,Other, Lead Free=Yes, Manufacturer Part Number=STM32G474CET6, Memory Size=512KBytes, Memory Type=FLASH, Mouser Description="Cortex M4 512K LQFP48 85°C", Number Of A/D Converters=5, Number Of Adc Channels=20, Number Of Cores=1, Number Of I2C Channels=4, Number Of I/Os=38, Number Of Pwm Channels=12, Number Of Spi Channels=3, Number Of Timers/Counters=14, Number Of Uart Channels=4, Number Of Usb Channels=1, Octopart=https://octopart.com/stm32g474cet6-stmicroelectronics-99072248, Ram Size=128KBytes, RoHS=TRUE, Standoff Height=0.05mm, Temperature Range High=+85°C, Temperature Range Low=-40°C
U2: library part CMP-04917-000300-1, "IC REG LINEAR 3.3V 300MA SOT23-5", RoHS Compliant=Yes
U3: library part CMP-074-000000-2, "Accelerometer, Gyroscope, Temperature, 6 Axis Sensor IÂ²C, SPI Output", Package="VFLGA-14 STMicroelectronics", Check_prices=https://www.snapeda.com/parts/LSM6DSO32TR/STMicroelectronics/view-part/?ref=eda, Component Type=Standard, Design Item ID=LSM6DSO32TR, MF=STMicroelectronics, MP=LSM6DSO32TR, Pin Count=14, SnapEDA_Link=https://www.snapeda.com/parts/LSM6DSO32TR/STMicroelectronics/view-part/?ref=snap, Source=LSM6DSO32TR.SchLib
U4: library part CMP-007-00035-2, "Intelligent Control LED Integrated Light Source, 3.5 to 5.3 V, -25 to 80 degC, 4-Pin SMD, RoHS, Bulk", Manufacturer="Adafruit Industries", Package Description="4-Pin Surface Mount Device, Body 5 x 5 mm, Pitch 3.3 mm", Case/Package=WS2812B, Datasheet URL=https://cdn-shop.adafruit.com/datasheets/WS2812B.pdf, Datasheet Version=May-13, Manufacturer URL=https://www.adafruit.com/, Mounting Technology=SM, Package Reference=WS2812B, RoHS Compliant=False
VR1: library part CMP-053-000000-2, "3-V to 17-V input voltage, 3-A Eco-mode synchronous buck module", Package="PowerFQFN-7 Texas Instruments", Check_prices=https://www.snapeda.com/parts/TPSM863252RDXR/Texas+Instruments/view-part/?ref=eda, Component Type=Standard, Design Item ID=TPSM863252RDXR, MF="Texas Instruments", MP=TPSM863252RDXR, Pin Count=7, SnapEDA_Link=https://www.snapeda.com/parts/TPSM863252RDXR/Texas+Instruments/view-part/?ref=snap, Source=TPSM863252RDXR.SchLib
X1: library part CMP-031-000000-2, "Crystals 2.0x1.6mm 24MHz 6pF - 40 C to + 85 C 50 Ohms", Manufacturer_Name="Kyocera AVX", Manufacturer_Part_Number=CX2016FB24000B0FZZH1, Datasheet Link=https://ele.kyocera.com/assets/products/crystal-device/specification/CX2016FB_6pF.pdf, Design Item ID=CX2016FB24000B0FZZH1, Geometry.Height=0.55mm, Source=CX2016FB24000B0FZZH1.SchLib
X2: library part CMP-011-00014-2, "DS01C-254-S-03BE - 3 Position, Through Hole, 2.54 mm Pitch, Raised Slide Actuator, Convex Bottom, Short Pin, DIP Switch", Manufacturer_Name="Same Sky", Mouser Part Number=490-DS01C-254-S-03BE, Datasheet Link=https://www.sameskydevices.com/product/resource/DS01C-254-S-03BE.pdf, Design Item ID=DS01C-254-S-03BE, Geometry.Height=7mm, Manufacturer_Part_Number=DS01C-254-S-03BE, Mouser Price/Stock=https://www.mouser.co.uk/ProductDetail/CUI-Devices/DS01C-254-S-03BE?qs=wnTfsH77Xs7A4kzYuxObfg%3D%3D, Source=DS01C-254-S-03BE.SchLib

## Nets (pads, with @x,y where several pads share a name; then routed paths per layer and width w, separated by ;. In a path a pad name is that pad's centre, name@x,y a point inside that pad or via, vN(x,y) a via of type N, cw(c..) or ccw(c..) an arc to the next point about the centre after c; other vN are vias at no path point)
5v_FB: R6.1 R7.2 VR1.7
+3v3: C1.2 C2.2 C3.2 C4.2 C5.2 C6.2 C7.2 C15.2 C16.2 C21.1 C22.1 C23.1 C24.1 DMUX1.16 DRV1.4 DRV2.4 J1.5 J2.5 J3.3 J4.1 R3.1 R8.2 R27.2 R28.2 R29.2 R30.2 R31.2 R32.2 SW1.B1 SW1.B2 SW2.B1 SW2.B2 U1.1 U1.20 U1.21 U1.24 U1.36 U1.48 U2.5 U3.5 U3.8 U4.1 X2.1 X2.3 X2.5
+5v: C13.2 C14.2 R6.2 R9.2 R12.2 R15.2 R18.2 R21.2 R24.2 U2.1 U2.3 VR1.3
A_1: IR1.2 R9.1
A_2: IR2.2 R12.1
A_3: IR3.2 R15.1
A_4: IR4.2 R18.1
A_5: IR5.2 R21.1
A_6: IR6.2 R24.1
BTN_1: C23.2 R36.2 SW1.A1 SW1.A2 U1.41
BTN_2: C24.2 R37.2 SW2.A1 SW2.A2 U1.27
DIP_1: R35.2 U1.2 X2.2
DIP_2: R34.2 U1.3 X2.4
DIP_3: R33.2 U1.4 X2.6
DMUX_A0: DMUX1.1 U1.42
DMUX_A1: DMUX1.2 U1.44
DMUX_A2: DMUX1.3 U1.46
DMUX_EN: DMUX1.6 U1.22
E_A_L: J1.3 U1.8
E_A_R: J2.3 U1.43
E_B_L: J1.4 U1.9
E_B_R: J2.4 U1.34
G_1: Q1.1 R10.2 R11.2
G_2: Q2.1 R13.2 R14.2
G_3: Q3.1 R16.2 R17.2
G_4: Q4.1 R19.2 R20.2
G_5: Q5.1 R22.2 R23.2
G_6: Q6.1 R25.2 R26.2
GND: C1.1 C2.1 C3.1 C4.1 C5.1 C6.1 C7.1 C8.1 C9.1 C10.2 C11.1 C12.1 C13.1 C14.1 C15.1 C16.1 C17.2 C18.2 C19.1 C20.1 C21.2 C22.2 D1.1 D2.1 D3.1 D4.1 D5.1 D6.1 DMUX1.4 DMUX1.5 DMUX1.8 DRV1.1 DRV1.7 DRV1.9 DRV2.1 DRV2.7 DRV2.9 J1.6 J2.6 J3.5 J3.7 J3.11 J4.2 J5.2 PWR.K Q1.2 Q2.2 Q3.2 Q4.2 Q5.2 Q6.2 R2.1 R5.1 R7.1 R11.1 R14.1 R17.1 R20.1 R23.1 R26.1 R33.1 R34.1 R35.1 R36.1 R37.1 U1.19 U1.23 U1.35 U1.47 U2.2 U3.2 U3.3 U3.6 U3.7 U4.3 VR1.4 X1.2 X1.4
IMU_CS: U1.12 U3.12
IMU_INT2: U1.16 U3.9
IMU_MISO: U1.14 U3.1
IMU_MOSI: U1.15 U3.14
IMU_SCK: U1.13 U3.13
IN_1_L: DRV1.3 U1.30
IN_1_R: DRV2.3 U1.32
IN_2_L: DRV1.2 U1.31
IN_2_R: DRV2.2 U1.33
IR_EM_1: DMUX1.15 R10.1
IR_EM_2: DMUX1.14 R13.1
IR_EM_3: DMUX1.13 R16.1
IR_EM_4: DMUX1.12 R19.1
IR_EM_5: DMUX1.11 R22.1
IR_EM_6: DMUX1.10 R25.1
IR_REC_1: D1.2 R27.1 U1.18
IR_REC_2: D2.2 R28.1 U1.17
IR_REC_3: D3.2 R29.1 U1.25
IR_REC_4: D4.2 R30.1 U1.26
IR_REC_5: D5.2 R31.1 U1.28
IR_REC_6: D6.2 R32.1 U1.29
K_1: IR1.1 Q1.3
K_2: IR2.1 Q2.3
K_3: IR3.1 Q3.3
K_4: IR4.1 Q4.3
K_5: IR5.1 Q5.3
K_6: IR6.1 Q6.3
LED_IN: U1.39 U4.4
MCU_BOOT0: R2.2 U1.45
MCU_NRST: C10.1 J3.12 R3.2 U1.7
MCU_OSC_IN: C8.2 U1.5 X1.1
MCU_OSC_OUT: R1.2 U1.6
MCU_SWCLK: J3.6 U1.38
MCU_SWDIO: J3.4 U1.37
MCU_SWO: J3.8 U1.40
ON_LED: PWR.A R8.1
OUT_1_L: DRV1.6 J1.1
OUT_1_R: DRV2.6 J2.1
OUT_2_L: DRV1.8 J1.2
OUT_2_R: DRV2.8 J2.2
UART_RX: J3.13 J4.3 U1.11
UART_TX: J3.14 J4.4 U1.10
VBAT: C17.1 C18.1 C19.2 C20.2 DRV1.5 DRV2.5 J5.1 S1.3
VBAT_SW: C11.2 C12.2 R4.2 S1.2 VR1.1
VDIV: R4.1 R5.2 VR1.6
XTAL_IN: C9.2 R1.1 X1.3
pads on no net: DMUX1.7 DMUX1.9 J3.1 J3.2 J3.9 J3.10 S1.1 S1.SH1 S1.SH2 U2.4 U3.4 U3.10 U3.11 U4.2 VR1.2 VR1.5 VR1.8 VR1.9 VR1.10 VR1.11 VR1.12 VR1.13 VR1.14 VR1.15 VR1.16 VR1.17 VR1.18 VR1.19

## Silkscreen, mask and mechanical layers (free items; w line width, h text height)
Top Overlay:
  lines w0.254: 50,103 50,107 ; 10,17 90,17 90,39 10,39 10,17
Mechanical 1:
  circle w0.013: c37.513,84.993 r1.15
  circle w0.013: c62.513,84.993 r1.15
  circle w0.013: c73.663,36.993 r1.15
  circle w0.013: c73.663,18.993 r1.15
  circle w0.013: c26.363,18.993 r1.15
  circle w0.013: c26.363,36.993 r1.15
  circle w0.013: c50.013,84.993 r6.5
  lines w0.013: 0.013,3.993 0.013,11.993 9.613,11.993 9.613,45.993 0.013,45.993 0.013,54.993 0.059,57.36 0.198,59.721 0.429,62.075 0.752,64.415 1.166,66.737 1.67,69.038 2.264,71.313 2.947,73.557 3.716,75.767 4.572,77.939 5.511,80.068 6.533,82.151 7.636,84.184 8.817,86.162 10.074,88.083 11.405,89.942 12.808,91.737 14.279,93.464 15.817,95.119 17.418,96.7 19.079,98.204 20.798,99.628 22.571,100.969 24.394,102.225 26.265,103.394 28.18,104.473 30.136,105.46 32.128,106.354 34.153,107.153 36.208,107.856 38.288,108.46 40.39,108.965 42.51,109.371 44.644,109.675 46.787,109.879 48.937,109.981 51.089,109.981 53.238,109.879 55.382,109.675 57.515,109.371 59.635,108.965 61.737,108.46 63.818,107.856 65.872,107.153 67.898,106.354 69.89,105.46 71.845,104.473 73.76,103.394 75.631,102.225 77.455,100.969 79.228,99.628 80.946,98.204 82.608,96.7 84.209,95.119 85.746,93.464 87.218,91.737 88.621,89.942 89.952,88.083 91.209,86.162 92.39,84.184 93.492,82.151 94.514,80.068 95.454,77.939 96.309,75.767 97.079,73.557 97.761,71.313 98.355,69.038 98.86,66.737 99.274,64.415 99.597,62.075 99.828,59.721 99.966,57.36 100.013,54.993 100.013,45.993 90.413,45.993 90.413,11.993 100.013,11.993 100.013,3.993 96.013,-0.007 4.013,-0.007 0.013,3.993

## Text inside footprints (layer, text, board x,y; h text height)
C17: Top Overlay "+" at 70.05,49.5 h1.22
C18: Top Overlay "+" at 28.375,51.186 h1.22 r180
PWR: Mechanical 13 "+" at 49.317,15.608 h0.5